# EAGLE board SlotCar_v1.0 (EAGLE 7.7.0)
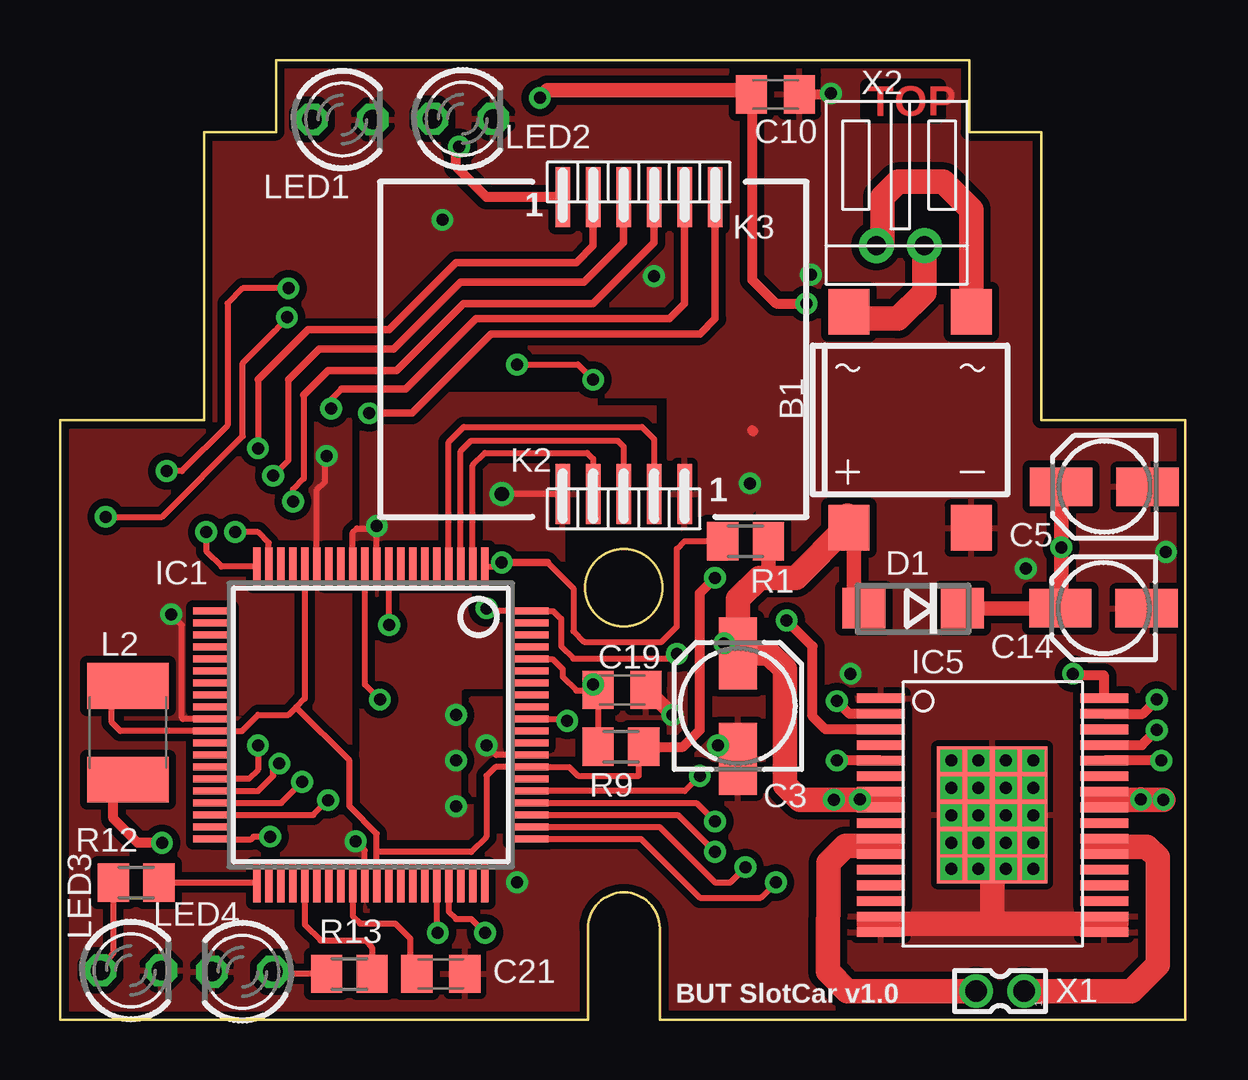
[diagram p0: board, top side]
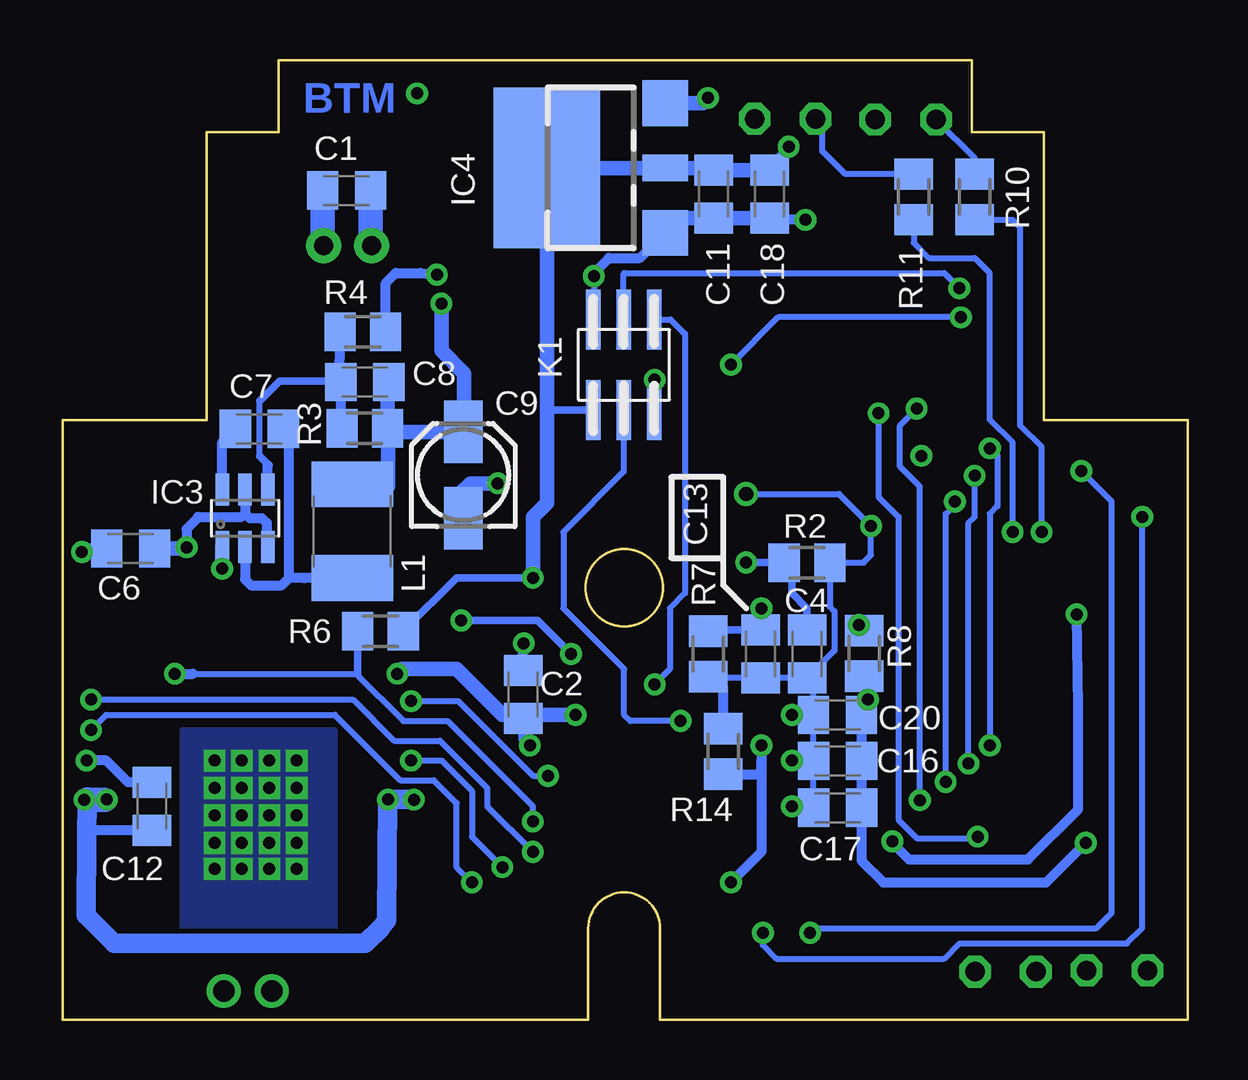
[diagram p1: board, bottom side, seen from below]

Size 46.9 x 40 mm. Coordinates in mm from the lower left corner, seen from the top.
Outline: 0,0 22,0 22,3.8 arc-180 25,3.8 25,0 46.9,0 46.9,25 40.9,25 40.9,37 37.9,37 37.9,40 9,40 9,37 6,37 6,25 0,25 0,0
Outline: circle at 23.5,18 radius 1.6
Copper layers (1*16): Top 0.035mm / dielectric 1.5mm / Bottom 0.035mm
Design rules "default *": minimum track width 0.2mm, minimum drill 0.4mm, track to track 0.2mm, track to pad 0.2mm, pad to pad 0.2mm, via to via 0.2mm, smd to smd 0mil, copper to edge 0.2mm, drill to drill 0.2mm, minimum pad ring 10mil, minimum via ring 8mil, stop-mask expansion 4mil, vias tented up to drill 0mil, thermal gap 10mil
bKeepout: area 21.3,15.8 to 25.7,20.2; 4 lines
bRestrict: area 19.8,0.1 to 27.2,7.5

## Footprints (pad centres in the part's own frame; a part is rotated, then mirrored left to right if it is on the bottom)
DBS = smd 1.7 x 1.9: + -2.55,-4.5; - 2.55,-4.5; AC1 -2.55,4.5; AC2 2.55,4.5
C0805K = smd 1.3 x 1.6: 1 -1,0; 2 1,0
153CLV-0505 = smd 3 x 1.6: + 2.2,0; - -2.2,0
153CLV-0405 = smd 2.6 x 1.6: + 1.8,0; - -1.8,0
DO214AC = smd 1.8 x 1.7: A 2.05,0; C -2.05,0
PN_S-PQFP-G80 = smd 0.3 x 1.6: 1 -4.75,-6.6; 2 -4.25,-6.6; 3 -3.75,-6.6; 4 -3.25,-6.6; 5 -2.75,-6.6; 6 -2.25,-6.6; 7 -1.75,-6.6; 8 -1.25,-6.6; 9 -0.75,-6.6; 10 -0.25,-6.6; 11 0.25,-6.6; 12 0.75,-6.6; 13 1.25,-6.6; 14 1.75,-6.6; 15 2.25,-6.6; 16 2.75,-6.6; 17 3.25,-6.6; 18 3.75,-6.6; 19 4.25,-6.6; 20 4.75,-6.6; 41 4.75,6.6; 42 4.25,6.6; 43 3.75,6.6; 44 3.25,6.6; 45 2.75,6.6; 46 2.25,6.6; 47 1.75,6.6; 48 1.25,6.6; 49 0.75,6.6; 50 0.25,6.6; 51 -0.25,6.6; 52 -0.75,6.6; 53 -1.25,6.6; 54 -1.75,6.6; 55 -2.25,6.6; 56 -2.75,6.6; 57 -3.25,6.6; 58 -3.75,6.6; 59 -4.25,6.6; 60 -4.75,6.6 | smd 1.6 x 0.3: 21 6.6,-4.75; 22 6.6,-4.25; 23 6.6,-3.75; 24 6.6,-3.25; 25 6.6,-2.75; 26 6.6,-2.25; 27 6.6,-1.75; 28 6.6,-1.25; 29 6.6,-0.75; 30 6.6,-0.25; 31 6.6,0.25; 32 6.6,0.75; 33 6.6,1.25; 34 6.6,1.75; 35 6.6,2.25; 36 6.6,2.75; 37 6.6,3.25; 38 6.6,3.75; 39 6.6,4.25; 40 6.6,4.75; 61 -6.6,4.75; 62 -6.6,4.25; 63 -6.6,3.75; 64 -6.6,3.25; 65 -6.6,2.75; 66 -6.6,2.25; 67 -6.6,1.75; 68 -6.6,1.25; 69 -6.6,0.75; 70 -6.6,0.25; 71 -6.6,-0.25; 72 -6.6,-0.75; 73 -6.6,-1.25; 74 -6.6,-1.75; 75 -6.6,-2.25; 76 -6.6,-2.75; 77 -6.6,-3.25; 78 -6.6,-3.75; 79 -6.6,-4.25; 80 -6.6,-4.75
SOT23-6 = smd 0.56 x 1.33: 1 -0.95,-1.2; 2 0,-1.2; 3 0.95,-1.2; 4 0.95,1.2; 5 0,1.2; 6 -0.95,1.2
SOT223 = smd 1.9 x 1.9: 1 -2.7,-3.1; 3 2.7,-3.1 | smd 1.1 x 1.9: 2 0,-3.1 | smd 6.7 x 4.44: 4 0,1.83
SOIC32W = smd 0.4 x 2: 1 -5.08,-3.81; 2 -4.43,-3.81; 3 -3.78,-3.81; 4 -3.13,-3.81; 5 -2.48,-3.81; 6 -1.83,-3.81; 7 -1.18,-3.81; 8 -0.53,-3.81; 9 0.12,-3.81; 10 0.77,-3.81; 11 1.42,-3.81; 12 2.07,-3.81; 13 2.72,-3.81; 14 3.37,-3.81; 15 4.02,-3.81; 16 4.67,-3.81; 17 4.67,5.508; 18 4.02,5.508; 19 3.37,5.508; 20 2.72,5.508; 21 2.07,5.508; 22 1.42,5.508; 23 0.77,5.508; 24 0.12,5.508; 25 -0.53,5.508; 26 -1.18,5.508; 27 -1.83,5.508; 28 -2.48,5.508; 29 -3.13,5.508; 30 -3.78,5.508; 31 -4.43,5.508; 32 -5.08,5.508 | smd 5.7 x 4.6: TH -0.217,0.836
PINHEAD_2X3_RM1.27 = smd 0.6 x 2.5: 1 -1.27,-1.27; 2 -1.27,2.5; 3 0,-1.27; 4 0,2.5; 5 1.27,-1.27; 6 1.27,2.5
PINHEAD_1X5_RM1.27SMD = smd 0.6 x 2.5: 1 -2.54,0; 2 -1.27,0; 3 0,0; 4 1.27,0; 5 2.54,0
PINHEAD_1X6_RM1.27SMD = smd 0.6 x 2.5: 1 -2.54,0; 2 -1.27,0; 3 0,0; 4 1.27,0; 5 2.54,0; 6 3.81,0
L1812 = smd 1.9 x 3.4: 1 -1.95,0; 2 1.95,0
LED3MM = drill 0.813 octagon: A -1.27,0; K 1.27,0
M0805 = smd 1.3 x 1.6: 1 -0.95,0; 2 0.95,0
332-02 = drill 0.9 pad 1.27: 1 0,-1; 2 0,1
JST-2.00MM-2P = drill 0.8 pad 1.45: 1 -1,-2.2; 2 1,-2.2

## Placement (x,y rotation side)
B1  DBLS201G  [DBS]  35.44,25 0 top
C1  100n/35V  [C0805K]  35.07,34.55 0 bottom
C2  100n/35V  [C0805K]  27.71,13.55 270 bottom
C3  47u/35V C  [153CLV-0505]  28.26,13.07 90 top
C4  100n  [C0805K]  15.88,15.24 270 bottom
C5  22u/35V B  [153CLV-0405]  43.53,22.21 180 top
C6  100n  [C0805K]  44.07,19.64 180 bottom
C7  100n  [C0805K]  38.7,24.62 180 bottom
C8  15p  [C0805K]  34.31,26.57 0 bottom
C9  47u/16V B  [153CLV-0405]  30.2,22.7 90 bottom
C10  100n  [C0805K]  29.82,38.56 0 top
C11  100n  [C0805K]  19.77,34.41 270 bottom
C12  33n  [C0805K]  43.18,8.89 270 bottom
C13  1u  [C0805K]  17.81,15.24 270 bottom
C14  22u/35V B  [153CLV-0405]  43.5,17.14 180 top
C16  1u  [C0805K]  14.6,10.78 180 bottom
C17  100n  [C0805K]  14.6,8.83 180 bottom
C18  1u  [C0805K]  17.44,34.41 270 bottom
C19  2n2  [C0805K]  23.43,13.74 0 top
C20  100n  [C0805K]  14.61,12.7 180 bottom
C21  470n  [C0805K]  15.88,1.91 0 top
D1  SK36A  [DO214AC]  35.56,17.14 180 top
IC1  MSP430F5418A  [PN_S-PQFP-G80]  12.96,12.28 180 top
IC3  RT6213BHGJ6F  [SOT23-6]  39.3,20.9 0 bottom
IC4  NCP1117ST33T3G  [SOT223]  24.89,35.5 90 bottom
IC5  MC34931EK  [SOIC32W]  38.02,8.31 270 top
K1  FTSH-103-01-L-DH  [PINHEAD_2X3_RM1.27]  23.52,27.91 180 bottom
K2  [PINHEAD_1X5_RM1.27SMD]  23.5,21.91 180 top
K3  [PINHEAD_1X6_RM1.27SMD]  23.5,34.29 0 top
L1  LQH43CN4R7M03  [L1812]  34.84,20.36 270 bottom
L2  LQH43CN4R7M03  [L1812]  2.83,11.96 90 top
LED1  3mm YEL  [LED3MM]  11.77,37.52 0 top
LED2  3mm YEL  [LED3MM]  16.79,37.55 0 top
LED3  3mm RED  [LED3MM]  2.96,2.05 0 top
LED4  3mm RED  [LED3MM]  7.61,1.99 180 top
R1  1k6  [M0805]  28.57,19.94 0 top
R2  330  [M0805]  15.88,19.05 180 bottom
R3  91k  [M0805]  34.31,24.65 180 bottom
R4  18k  [M0805]  34.39,28.67 180 bottom
R6  10k  [M0805]  33.66,16.19 0 bottom
R7  270R  [M0805]  20,15.24 90 bottom
R8  0R  [M0805]  13.49,15.26 90 bottom
R9  47k  [M0805]  23.38,11.37 180 top
R10  680R  [M0805]  8.89,34.29 270 bottom
R11  680R  [M0805]  11.43,34.29 270 bottom
R12  680R  [M0805]  3.17,5.71 0 top
R13  680R  [M0805]  12.06,1.91 0 top
R14  0R  [M0805]  19.37,11.18 270 bottom
X1  332-02  [332-02]  39.19,1.19 90 top
X2  B2B-PH-SM4-TB(LF)(SN)  [JST-2.00MM-2P]  35.03,34.46 0 top

## Library data of the parts
B1 = rectifier
C1-C14 C16-C21 L1 L2 R1-R4 R6-R14 = rcl
D1 = diode
IC1 = texas; MPN: MSP430F5418AIPN; OC_FARNELL: 1740334; OC_NEWARK: 68R9290
IC3-IC5 K1-K3 X2 = _dos
LED1-LED4 = led
X1 = con-garry

## Nets
+3V3: C11.1 C18.1 IC1.16 IC1.31 IC1.51 IC1.67 IC4.2 IC4.4 K1.6 K3.1 L2.2 R6.2 R9.1
+3V3A: C16.1 C17.1 C20.1 IC1.11 L2.1 R8.1
+5V: C8.2 C9.+ C10.1 IC4.3 L1.1 R3.1
+12V: B1.+ C2.1 C3.+ C12.2 D1.A IC5.7 IC5.8 IC5.25 IC5.26 R1.2
ADC5: IC1.4 K2.2
ADC6: IC1.3 K2.3
ADC7: IC1.2 K2.4
AGND: C4.2 C13.2 C16.2 C17.2 C20.2 IC1.10 IC1.12 K2.5 R2.1 R7.1 R14.1
GND: B1.- C2.2 C3.- C5.- C6.2 C9.- C10.2 C11.2 C14.- C18.2 C19.2 C21.2 IC1.15 IC1.30 IC1.50 IC1.68 IC3.1 IC4.1 IC5.1 IC5.15 IC5.16 IC5.17 IC5.18 IC5.TH K1.5 K2.1 LED1.K LED2.K LED3.K LED4.K R4.1 R14.2
H_D1: IC1.65 IC5.2
H_EN/!D2: IC1.62 IC5.5
H_FB: C13.1 IC1.80 IC5.3 R7.2
H_IN1: IC1.63 IC5.31
H_IN2: IC1.61 IC5.29
H_STATUS: IC1.64 IC5.32 R6.1
LED_FRONT_LEFT: IC1.20 R10.2
LED_FRONT_RIGHT: IC1.19 R11.2
LED_REAR_LEFT: IC1.41 R12.2
LED_REAR_RIGHT: IC1.45 R13.2
N$1: IC5.10 IC5.11 X1.2
N$2: B1.AC2 C1.2 X2.1
N$3: B1.AC1 C1.1 X2.2
N$4: IC5.22 IC5.23 X1.1
N$5: C12.1 IC5.28
N$6: C7.2 IC3.6
N$7: C7.1 IC3.2 L1.2
N$8: C8.1 IC3.4 R3.2 R4.2
N$9: LED1.A R10.1
N$10: IC1.9 R8.2
N$11: LED2.A R11.1
N$12: LED3.A R12.1
N$13: LED4.A R13.1
N$14: C21.1 IC1.49
N$15: C5.+ C6.1 C14.+ D1.C IC3.3 IC3.5
RXD: IC1.57 K1.2
SBW_!RST: C19.1 IC1.76 K1.1 R9.2
SBW_TEST: IC1.71 K1.4
SENS_GPIO: IC1.40 K3.6
SPI_CLK: IC1.38 K3.5
SPI_MISO/I2C_CLK: IC1.37 K3.4
SPI_MOSI/I2C_SDA: IC1.36 K3.3
SPI_SS: IC1.35 K3.2
TXD: IC1.56 K1.3
V_RAIL: C4.1 IC1.1 R1.1 R2.2

## Tracks (layer width: path | path; a pad name or v marks a point on that pad's centre or on a via)
+3V3  (via drill 0.5)
  Top 0.254: IC1.16 10.21,13.38 9.84,13.02 | 9.84,13.02 9.53,12.7 8.26,12.7 7.58,12.03 IC1.31 2.51,12.03 2.16,12.38 2.16,13.86 L2.2 | IC1.51 13.21,6.99 | R9.1 24.13,11.17 24.13,10.16 21.59,10.16 21.22,10.53 IC1.67 18.15,10.53 17.78,10.16 17.78,7.62 17.14,6.99 13.21,6.99 | 13.21,6.99 13.21,7.75 12.06,8.89 12.06,10.79 9.84,13.02
  Top 0.406: R9.1 25.98,11.37 26.67,12.06 26.67,17.78 v27.3,18.41 | K3.1 17.78,34.29 16.51,35.56 16.51,36.26 v16.64,36.39
  Bottom 0.305: v27.3,18.41 30.48,18.41 R6.2 | K1.6 26.71,25.41 26.72,25.4 | 17.34,35.31 17.34,35.69 v16.64,36.39
  Bottom 0.406: 17.34,35.31 C18.1
  Bottom 0.61: C18.1 C11.1 19.86,35.5 IC4.2 IC4.4 26.72,25.4 26.72,21.54 27.3,20.95 v27.3,18.41
+3V3A  (via drill 0.5)
  Top 0.254: IC1.11 12.71,13.96 v13.34,13.34
  Top 0.406: v4.25,7.37 3.24,7.37 2.22,8.38 2.22,9.98 L2.1
  Bottom 0.254: v13.34,13.34 13.34,14.15 R8.1 13.49,12.81 C20.1
  Bottom 0.406: C20.1 13.61,10.79 | 13.61,10.79 13.61,8.89 | 13.61,8.89 13.61,6.62 12.7,5.71 5.91,5.71 v4.25,7.37 | C17.1 13.6,8.89 13.61,8.89 | C16.1 13.61,10.79
+5V  (via drill 0.5)
  Top 0.406: 28.85,38.46 28.85,30.84 29.84,29.84 v31.11,29.84
  Top 0.61: C10.1 28.85,38.54 28.85,38.46 28.57,38.73 20.32,38.73 v20,38.42
  Bottom 0.406: L1.1 33.73,22.3 33.34,22.23 | 33.34,24.31 R3.1 | 33.36,26.52 C8.2
  Bottom 0.61: 33.34,22.23 33.34,24.31 | 33.36,26.52 R3.1 33.2,24.5 C9.+ 30.16,24.54 30.16,26.92 31.11,27.88 v31.11,29.84 | IC4.3 20.22,38.2 v20,38.42
+12V  (via drill 0.5)
  Top 0.254: 34.7,9.15 34.52,9.15 IC5.8 IC5.7 | v32.26,9.16 30.21,9.75 30.25,9.75 30.85,9.15 30.87,9.17 v33.34,9.17 | IC5.25 IC5.26 43.49,9.49 43.18,9.18 43.17,9.18 43.16,9.16
  Top 0.406: C3.+ 28.1,15.27 v27.69,15.68 | R1.2 29.53,19.68
  Top 0.61: 32.88,20.5 B1.+ 33.08,20.3 33.08,17.14 D1.A | R1.2 29.52,18.67 29.15,18.41
  Top 1.016: 34.7,9.15 30.85,9.15 30.23,9.77 30.23,14.61 29.56,15.27 C3.+ 28.26,17.53 29.15,18.41 30.67,18.41 32.81,20.55 32.83,20.55 | v46,9.16 v45.07,9.16 | v45.07,9.16 v45.06,9.17 | v45.07,9.16 43.16,9.16 43.14,9.18 | 32.89,20.95 32.83,21.02 32.83,20.55 | 32.83,20.55 B1.+
  Bottom 0.254: 45.86,9.18 45.98,9.18 v46,9.16
  Bottom 0.406: C12.2 45.63,7.89 45.9,7.62 | C2.1 27.71,15.66 v27.69,15.68
  Bottom 0.813: 45.88,9.12 45.9,7.62 45.92,4.34 44.76,3.17 34.29,3.17 33.66,3.81 33.4,4.13 33.36,9.18 32.56,9.18 v32.26,9.16
  Bottom 1.016: 45.88,9.12 45.16,9.15 45.86,9.18 45.86,9.16
ADC5
  Top 0.254: IC1.4 16.2,24.08 16.83,24.7 24.26,24.7 24.77,24.19 K2.2
ADC6
  Top 0.254: IC1.3 16.7,23.69 17.14,24.13 23.24,24.13 23.5,23.88 K2.3
ADC7
  Top 0.254: IC1.2 17.2,23.11 17.72,23.62 21.97,23.62 22.23,23.37 K2.4
AGND  (via drill 0.5, 0.6)
  Top 0.254: IC1.12 12.21,20.31 12.38,20.48 13,20.48 | 13,20.48 13.21,20.27 IC1.10 | 13,20.48 13.11,20.48 v13.21,20.57 | K2.5 v18.41,21.91
  Bottom 0.254: C4.2 14.73,15.38 14.73,17.02 14.93,17.21 R2.1 13.52,19.05 13.21,19.37 v13.21,20.57 14.54,21.91 v18.41,21.91 | C17.2 C16.2 C20.2 15.61,13.97 C4.2 | C4.2 C13.2 19.95,14.24 R7.1
  Bottom 0.305: v16.51,8.89 15.66,8.89 C17.2
  Bottom 0.406: R14.1 19.37,13.85 R7.1
  other vias: 16.51,12.7 16.51,10.79
  pour Top (isolate 0.305, rank 2): 12.06,26.04 12.06,7.62 17.14,7.62 17.14,13.34 20.95,13.34 20.95,21.59 24.77,21.59 24.77,26.04
GND  (via drill 0.5)
  Top 0.254: IC1.15 10.71,22.07 11.05,22.42 11.05,23.43 v11.11,23.5 | IC1.68 18.18,11.03 v17.78,11.43 | IC1.50 12.71,7.04 v12.32,7.43 | IC5.16 IC5.15 33.72,4.29 33.72,3.99 | 44.03,3.98 44.03,4.29 IC5.18 IC5.17 | IC1.30 5.12,12.53 5.08,12.57 5.08,16.45 v4.64,16.89
  Top 0.406: 28.85,24.55 28.89,24.51 | C10.2 32.09,38.56 v32.13,38.61 | 27.99,10.87 v27.43,11.43
  Top 0.61: C19.2 24.49,13.74 v25.53,12.7
  Top 1.016: IC5.TH 38.86,3.99 | 38.86,3.99 33.72,3.99 | 38.86,3.99 38.86,3.98 44.03,3.98
  Bottom 0.254: v24.77,30.99 24.77,29.2 K1.5 | C18.2 17.44,33.38 17.4,33.34
  Bottom 0.406: v17.78,11.43 17.78,10.79 | 17.78,10.79 17.78,6.99 v19.05,5.71 | R14.2 17.78,10.23 17.78,10.79 | C2.2 27.71,11.71 v27.43,11.43 | R4.1 33.44,30.7 33.02,31.11 32,31.11 v31.3,31.05 | 21.59,32.38 21.59,33.02 21.79,32.82 IC4.1 22.84,31.75 24.13,31.75 24.77,31.11 v24.77,30.99 | v15.94,33.34 17.4,33.34 | v12.32,7.43 12.32,7.37 11.62,6.67 6.67,6.67 4.57,8.76 4.57,13.02 v4.64,16.89
  Bottom 0.61: C18.2 C11.2 21.18,33.41 IC4.1 | v25.53,12.7 27.56,12.7 C2.2 27.86,12.7 28.57,12.7 30.48,14.61 32.77,14.61 v32.96,14.41 | IC3.1 v40.25,18.8 v40.26,18.8 | C6.2 45.33,19.64 v46.1,19.49 | v28.77,22.35 29.91,22.35 30.29,21.97 30.29,20.98 C9.-
  other vias: 37.15,10.79 38.29,10.79 39.43,10.79 40.58,10.79 37.15,9.65 38.29,9.65 39.43,9.65 40.58,9.65 37.15,8.51 38.29,8.51 39.43,8.51 40.58,8.51 37.15,7.37 38.29,7.37 39.43,7.37 40.58,7.37 37.15,6.29 38.29,6.29 39.43,6.29 40.58,6.29
  pour Top (isolate 0.305): 31.75,40.01 8.89,40.01 8.89,37.47 5.71,37.47 5.71,25.4 0,25.4 0,0 21.59,0 21.59,7.62 12.06,7.62 12.06,26.04 25.4,26.04 25.4,13.34 17.14,13.34 17.14,8.26 27.3,8.26 27.94,7.62 27.94,20.32 31.75,24.13
  pour Top (isolate 0.305): 31.75,40.01 31.75,24.13 26.67,18.41 26.67,7.62 26.04,6.99 21.59,6.99 20.95,6.35 20.89,0.51 46.93,0.51 46.99,24.77 40.64,24.77 40.64,36.83 38.1,36.83 38.1,40.01
  pour Bottom: 35.56,12.06 35.56,3.81 41.91,3.81 41.91,12.06
H_D1  (via drill 0.5)
  Top 0.254: v26.67,10.16 26.04,9.53 IC1.65
  Top 0.406: IC5.2 32.91,12.74 v32.38,13.27
  Bottom 0.254: v32.38,13.27 30.42,13.27 27.3,10.16 v26.67,10.16
H_EN/!D2  (via drill 0.5)
  Top 0.254: IC1.62 24.99,8.03 27.3,5.71 27.94,5.71 v28.57,6.35
  Top 0.406: IC5.5 v32.38,10.79
  Bottom 0.254: v32.38,10.79 31.11,10.79 29.84,9.53 29.84,7.62 v28.57,6.35
H_FB  (via drill 0.5)
  Top 0.254: 17.89,17.03 IC1.80 20.56,17.03 20.89,16.7 20.89,15.56 21.4,15.05 25.53,15.05 v25.72,15.24
  Top 0.305: 17.89,17.03 v17.78,17.14
  Top 0.406: IC5.3 31.91,12.1 31.37,12.64 31.37,15.56 v30.29,16.64
  Bottom 0.305: v30.29,16.64 27.11,16.64 v25.72,15.24 | 20.32,15.88 R7.2 19.95,16.24 C13.1 17.78,16.27 v17.78,17.14
H_IN1  (via drill 0.5)
  Top 0.254: IC1.63 25.76,8.53 v27.3,6.99
  Top 0.406: IC5.31 45.13,12.74 v45.72,13.34
  Bottom 0.254: v45.72,13.34 34.8,13.34 33.08,11.62 31.18,11.62 29.21,9.65 29.21,8.89 v27.3,6.99
H_IN2  (via drill 0.5)
  Top 0.254: IC1.61 24.22,7.53 26.67,5.08 29.21,5.08 v29.84,5.71
  Top 0.406: IC5.29 45.1,11.45 v45.72,12.06
  Bottom 0.254: v45.72,12.06 45.09,12.7 35.56,12.7 32.83,9.97 31.43,9.97 30.48,9.02 30.48,6.35 v29.84,5.71
H_STATUS  (via drill 0.5)
  Top 0.254: IC1.64 26.53,9.03 v27.3,8.26
  Top 0.406: IC5.32 43.53,14.32 43.5,14.35 42.29,14.35 v42.23,14.41
  Bottom 0.254: 41.47,14.41 34.67,14.41 | 34.61,14.41 34.67,14.41 | 34.67,14.41 32.7,12.45 30.86,12.45 27.3,8.89 v27.3,8.26
  Bottom 0.305: R6.1 34.6,14.73 34.61,14.41
  Bottom 0.406: v42.23,14.41 41.47,14.41
LED_FRONT_LEFT  (via drill 0.5)
  Top 0.254: IC1.20 6.73,18.88 6.1,19.52 v6.1,20.32
  Bottom 0.254: v6.1,20.32 6.1,23.88 6.99,24.77 6.99,33.02 7.3,33.34 R10.2
LED_FRONT_RIGHT  (via drill 0.5)
  Top 0.254: IC1.19 8.71,19.87 8.26,20.32 v7.3,20.32
  Bottom 0.254: v7.3,20.32 7.3,24.07 8.26,25.02 8.26,31.11 8.89,31.75 10.79,31.75 11.43,32.38 R11.2
LED_REAR_LEFT
  Top 0.254: R12.2 8.17,5.71 IC1.41
LED_REAR_RIGHT
  Top 0.254: IC1.45 10.21,3.96 10.86,3.3 12.76,3.3 13.02,2.98 R13.2
N$1
  Top 0.254: 34.66,7.23 34.52,7.23 IC5.10 IC5.11
  Top 1.016: X1.2 32.83,1.19 32.01,2 32.02,6.52 32.73,7.23 34.66,7.23 34.7,7.23
N$2
  Top 1.016: B1.AC2 37.98,33.77 36.83,34.92 34.92,34.92 34.29,34.29 34.29,32.27 X2.1
  Bottom 1.016: C1.2 34.07,32.73 X2.1
N$3
  Top 1.016: X2.2 36.03,30.31 34.92,29.21 33.17,29.21 B1.AC1
  Bottom 1.016: C1.1 36.07,32.73 X2.2
N$4
  Top 0.254: IC5.23 IC5.22 43.21,7.21 43.05,7.21
  Top 1.016: X1.1 44.66,1.19 45.75,2.27 45.75,6.75 45.3,7.21 43.05,7.21
N$5  (via drill 0.5)
  Top 0.406: v45.91,10.79 IC5.28
  Bottom 0.406: C12.1 44.18,9.89 45.09,10.79 v45.91,10.79
N$6
  Bottom 0.406: IC3.6 40.25,24.07 C7.2
N$7
  Bottom 0.406: IC3.2 39.3,18.34 39.05,18.1 37.78,18.1 37.47,18.41 | 37.47,18.41 37.47,24.07 C7.1 | L1.2 36.82,18.41 37.47,18.41
N$8
  Bottom 0.25: 38.69,23.5 38.69,25.78
  Bottom 0.305: 38.35,23.11 38.35,23.15 38.69,23.5 | 35.31,26.61 37.87,26.61 38.69,25.78
  Bottom 0.406: R4.2 35.38,27.14 C8.1 | C8.1 35.31,26.61 | IC3.4 38.35,23.11 | C8.1 35.31,24.7 R3.2
N$9
  Bottom 0.254: R10.1 8.89,35.91 LED1.A
N$10  (via drill 0.5)
  Top 0.254: v13.72,16.45 IC1.9
  Bottom 0.254: 13.83,15.88 R8.2 13.61,16.21 v13.72,16.45
N$11
  Bottom 0.254: R11.1 14.29,35.24 15.24,36.2 15.24,37.27 LED2.A
N$12
  Top 0.254: R12.1 2.23,2.78 LED3.A
N$13
  Top 0.254: R13.1 8.96,1.91 LED4.A
N$14
  Top 0.254: IC1.49 12.21,4.3 12.51,4 13.97,4 14.61,3.37 14.61,1.91 14.86,1.65 C21.1
N$15  (via drill 0.5)
  Top 0.61: D1.C C14.+ 41.73,17.18 v41.73,19.68 C5.+
  Bottom 0.406: IC3.5 39.3,21.1 | 39.3,21.1 39.1,20.9 38.6,20.9 38.4,20.7 38.4,19.75 IC3.3 38.34,19.68 | 39.3,21.1 39.45,20.95 41.27,20.95 41.27,20.91 41.73,20.45 v41.73,19.68
  Bottom 0.61: C6.1 41.78,19.64 v41.73,19.68
RXD  (via drill 0.5)
  Top 0.254: IC1.57 16.2,4.5 16.51,4.19 17.14,4.19 v17.72,3.62 | v1.91,20.95 4.25,20.95 7.62,24.32 7.62,27.37 8.95,28.7 9.53,29.34 v9.46,29.27 | v19.05,27.3 21.59,27.3 v22.23,26.67
  Bottom 0.254: v17.72,3.62 17.72,3.11 17.14,2.54 10.16,2.54 9.53,3.17 2.54,3.17 1.91,3.81 v1.91,20.95 | v9.46,29.27 17.08,29.27 v19.05,27.3 | v22.23,26.67 22.23,25.43 K1.2
SBW_!RST  (via drill 0.5)
  Top 0.254: 22.48,13.79 C19.1 | C19.1 R9.2 | C19.1 22.23,13.95 v22.23,13.97 21.97,13.72 21.53,13.72 20.95,14.29 20.95,14.61 20.53,15.03 IC1.76
  Bottom 0.254: K1.1 21.56,29.18 20.95,28.57 20.95,17.78 21.59,17.14 21.59,14.61 v22.23,13.97
SBW_TEST  (via drill 0.5)
  Top 0.254: IC1.71 21.06,12.53 v21.14,12.45
  Bottom 0.254: K1.4 23.52,22.84 26.04,20.32 26.04,17.14 23.5,14.61 23.5,12.7 23.24,12.45 v21.14,12.45
SENS_GPIO  (via drill 0.5)
  Top 0.254: v8.76,7.62 8.06,7.62 7.94,7.49 6.39,7.49 IC1.40
  Top 0.305: v12.89,25.27 14.67,25.27 17.97,28.57 26.67,28.57 27.3,29.21 K3.6
  Bottom 0.254: v12.89,25.27 12.89,21.78 12.06,20.95 12.06,8.32 11.3,7.56 8.83,7.56 v8.76,7.62
SPI_CLK  (via drill 0.5)
  Top 0.254: IC1.38 10.56,8.53 v11.18,9.14 | v11.3,25.46 11.3,25.84 11.75,26.29
  Top 0.305: K3.5 26.04,29.84 25.4,29.21 17.34,29.21 14.41,26.29 11.75,26.29
  Bottom 0.254: v11.3,25.46 12,24.77 12,23.05 11.18,22.23 v11.18,9.14
SPI_MISO/I2C_CLK  (via drill 0.5)
  Top 0.254: 10.16,26.04 10.16,22.54 9.72,22.1 v9.72,21.59 | IC1.37 9.22,9.03 v10.1,9.91
  Top 0.305: K3.4 24.77,32.38 22.23,29.84 16.83,29.84 14.03,27.05 11.18,27.05 10.16,26.04
  Bottom 0.254: v10.1,9.91 10.1,21.08 9.65,21.53 | 9.59,21.46 9.65,21.53 | 9.65,21.53 v9.72,21.59
SPI_MOSI/I2C_SDA  (via drill 0.5)
  Top 0.254: IC1.36 8.26,9.53 8.89,10.16 8.89,10.41 v9.14,10.67 | v8.89,22.67 9.53,23.3 9.53,26.67
  Top 0.305: K3.3 23.5,32.38 21.84,30.73 16.7,30.73 13.91,27.94 10.79,27.94 9.53,26.67
  Bottom 0.254: v8.89,22.67 8.89,20.95 9.14,20.7 v9.14,10.67
SPI_SS  (via drill 0.5)
  Top 0.254: 8.26,26.67 v8.26,23.81 | v8.26,11.43 8.26,10.41 7.87,10.03 IC1.35
  Top 0.305: K3.2 22.23,32.26 21.53,31.56 16.51,31.56 13.72,28.77 10.35,28.77 8.26,26.67
  Bottom 0.254: v8.26,23.81 7.94,23.5 7.94,21.4 8.26,21.08 v8.26,11.43
TXD  (via drill 0.5)
  Top 0.254: IC1.56 15.71,4.11 v15.75,3.62 | v9.53,30.48 7.62,30.48 6.99,29.84 6.99,24.77 5.08,22.86 v4.45,22.86
  Bottom 0.254: v15.75,3.62 16.07,3.62 15.88,3.81 3.81,3.81 3.17,4.45 3.17,21.59 v4.45,22.86 | K1.3 23.52,31.09 23.5,31.11 10.16,31.11 v9.53,30.48
V_RAIL  (via drill 0.5)
  Top 0.254: IC1.1 18.25,18.88 v18.41,19.05 | 20.32,19.05 21.4,17.97 21.4,16.19 21.84,15.75 25.08,15.75 25.72,16.38 25.72,19.62 26.04,19.94 R1.1
  Top 0.305: 20.32,19.05 v18.41,19.05
  Bottom 0.305: C4.1 15.88,17.14 16.51,17.78 16.51,18.73 R2.2 v18.41,19.05

## Text on the board
Top: TOP
Bottom: BTM
tPlace: 1 | 1
tNames: BUT SlotCar v1.0